# Altium PCB car_in.PcbDoc
Units mil, origin at the board's own origin, x right, y up, seen from the top; angles counter-clockwise.
Board outline 1710 x 1320 mil, 2 copper layers (Top Layer, Bottom Layer); 38 components, 25 nets, 152 pads, 64 vias.
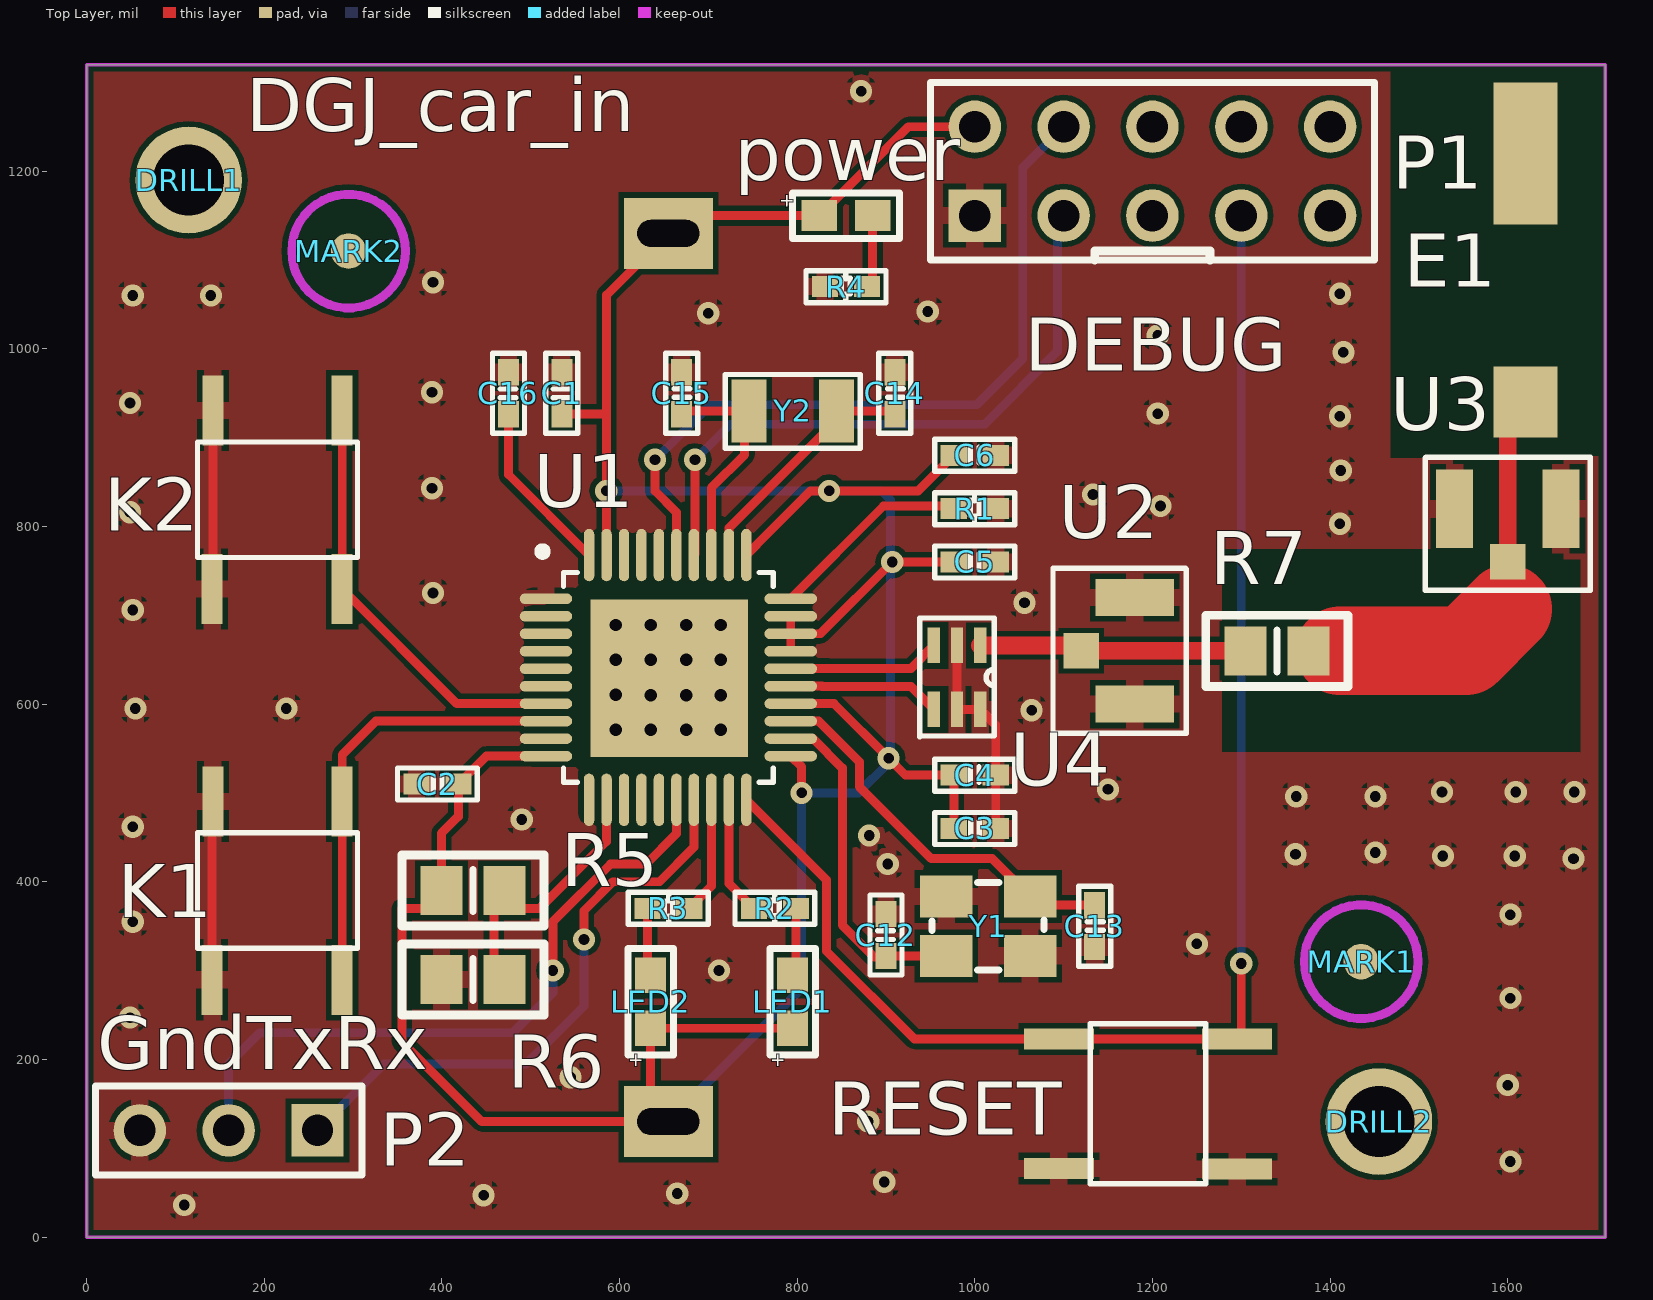
[diagram p0: Top Layer view]
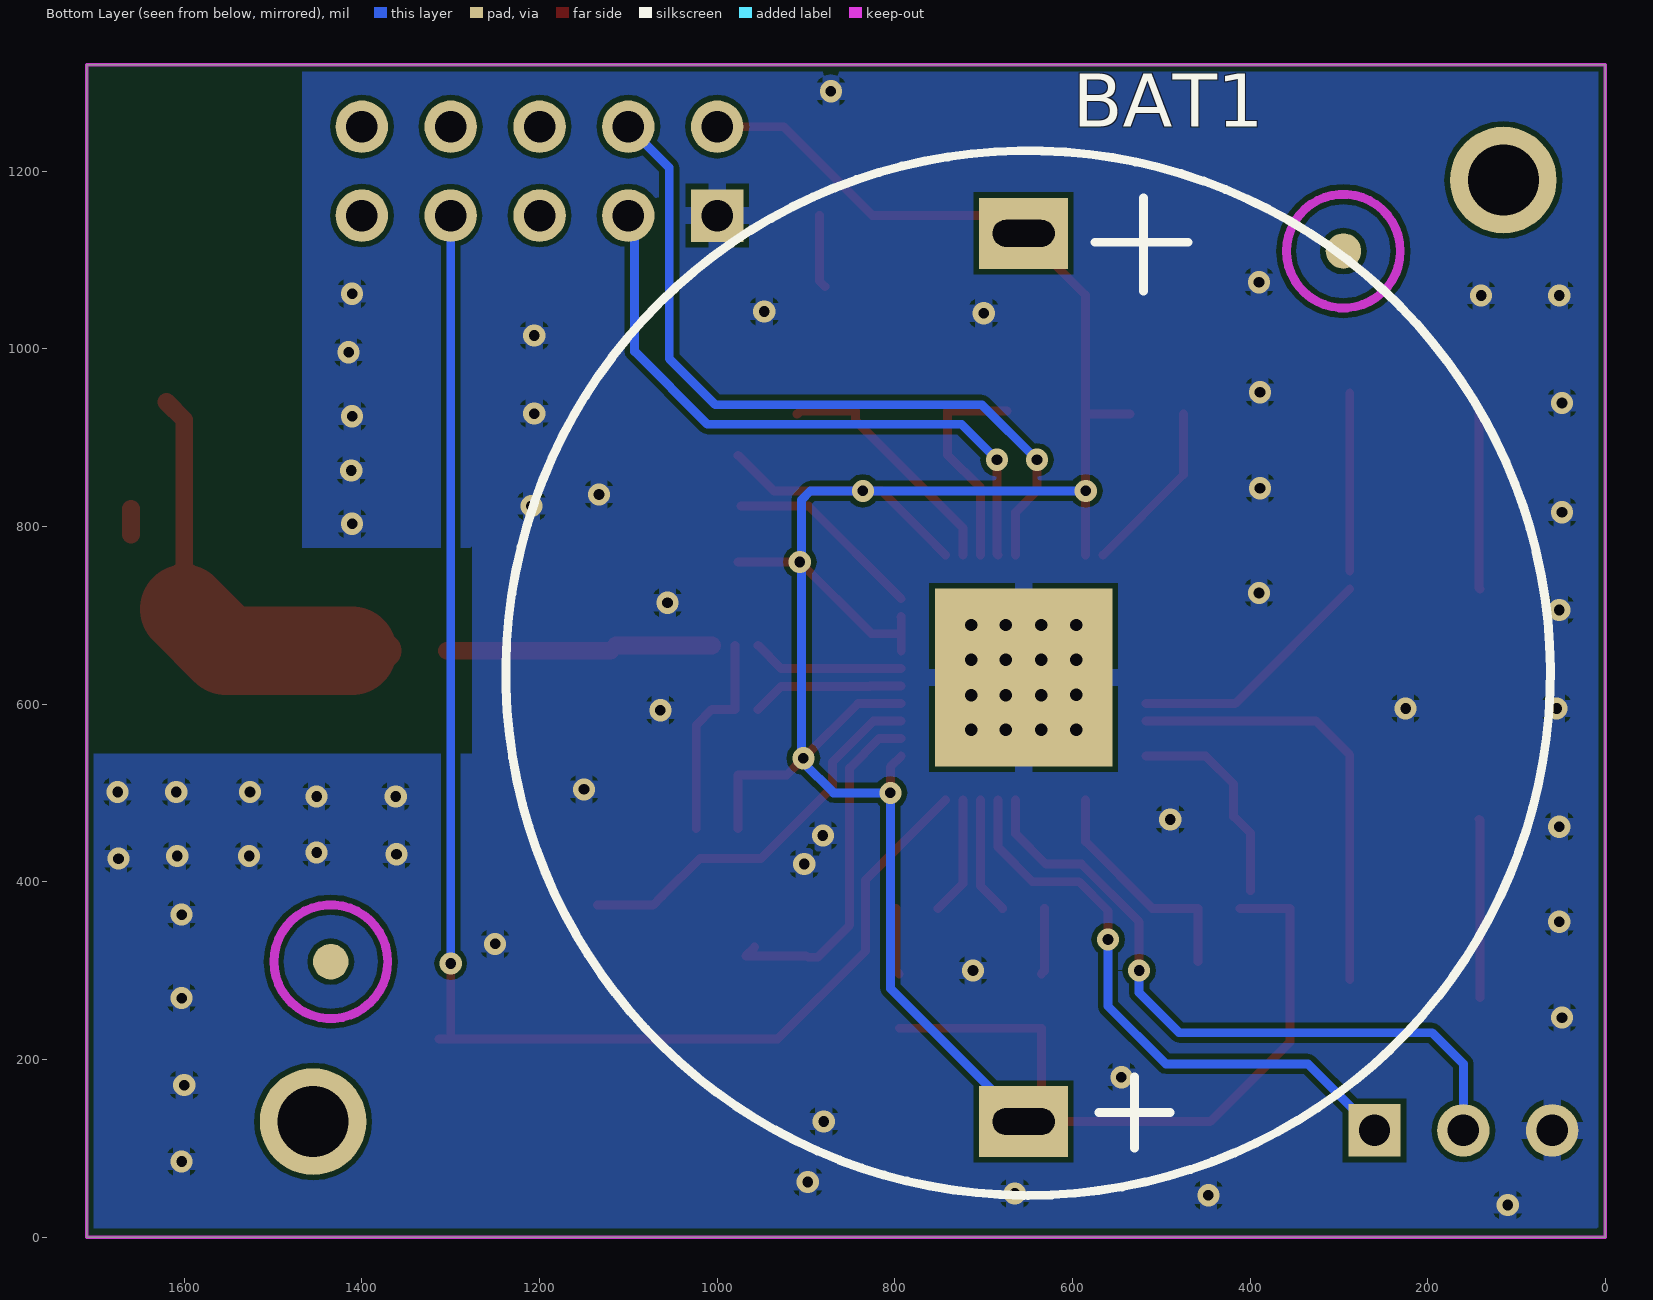
[diagram p1: Bottom Layer view, seen from below]

## Layer stack, top to bottom
Top Layer: signal copper 1.4
Dielectric: dielectric 12.6, FR-4, Dk 4.8
Bottom Layer: signal copper 1.4

## Board outline
1710,440 1710,1320 0,1320 0,0 1710,0

## Design rules (kind name [scope] priority, off if disabled: settings)
Clearance [All] p1: gap=6
DiffPairsRouting [All] p1: maxlimit=10 minlimit=10 mostfreqgap=10 maxuncoupledlength=100
PlaneConnect [All] p1: planeconnectstyle=Relief reliefexpansion=20 reliefentries=4 reliefconductorwidth=10 reliefairgap=20
PolygonConnect [All] p1: connectstyle=Relief reliefconductorwidth=20 reliefentries=4 polygonreliefangle="90 Angle"
RoutingVias [All] p1: holewidth=12 width=25 viastyle="Through Hole" minholewidth=12 minwidth=25 maxholewidth=28 maxwidth=50
SilkscreenOverComponentPads [All] p1: minsilkscreentomaskgap=10
SolderMaskExpansion [All] p1: expansion=4
Width [All] p1: maxlimit=100 minlimit=10 preferedwidth=10
25 further rules are at their usual default settings.

## Classes and differential pairs
differential pair RF1: +RF1_P -RF1_N

## Components (designator, comment, footprint, x,y, rotation, side; value= is the part's Value field where it differs from the comment)
BAT1 "BAT_CR2477" CR2477 655,630 r270 bottom
C1 "0.1uF,0402" C0402 535,950 r270 top
C2 "0.1uF,0402" C0402 395,510 r0 top
C3 "0.1uF,0402" C0402 1000,460 r0 top
C4 "0.1uF,0402" C0402 1000,520 r180 top
C5 "0.1uF,0402" C0402 1000,760 r180 top
C6 "1uF,0402" C0402 1000,880 r180 top
C12 "27pF,0402" C0402 900,340 r270 top
C13 "27pF,0402" C0402 1135,350 r90 top
C14 "15pF,0402" C0402 910,950 r90 top
C15 "15pF,0402" C0402 670,950 r90 top
C16 "0.1uF,0402" C0402 475,950 r270 top
DRILL1 "DRILL" DRILL_2MM 115,1190 r90 top
DRILL2 "DRILL" DRILL_2MM 1455,130 r90 top
E1 "2450AT42A100" BT_ANT_PCB 1620,940 r90 top
K1 "KEY_SMT_4PIN" KEY-SMT 215,390 r270 top
K2 "KEY_SMT_4PIN" KEY-SMT 215,830 r270 top
LED1 "0603_SMD" LED0603 795,265 r90 top
LED2 "0603_SMD" LED0603 635,265 r90 top
MARK1 "MARK POINT" MARK_POINT 1435,310 r90 top
MARK2 "MARK POINT" MARK_POINT 295,1110 r90 top
P1 "DEBUG" HDR2X5 1200,1200 r90 top
P2 "GndTxRx" HDR1X3 260,120 r180 top
power "0603_SMD" LED0603 855,1150 r0 top
R1 "56k,0402" R0402 1000,820 r180 top
R2 "1k,0402" R0402 775,370 r180 top
R3 "1k,0402" R0402 655,370 r0 top
R4 "1k,0402" R0402 855,1070 r180 top
R5 "15k,0805" R0805 435,390 r0 top
R6 "10k,0805" R0805 435,290 r180 top
R7 "56k,0402" R0805 1340,660 r0 top
RESET "KEY_SMT_4PIN" KEY-SMT 1195,150 r0 top
U1 "CC2541F256" PQFP40 655,630 r0 top
U2 "ipex" IPEX 1180,720 r0 top
U3 "ipex" IPEX 1540,820 r90 top
U4 "2450BM15A002" 2450BM15A002 980,630 r270 top
Y1 "32.000MHz/SX-32" 1210 1015,350 r0 top
Y2 "32.768kHz" 1206 795,930 r0 top

## Footprints (in the part's own frame and the unit in brackets; to place one, negate y for a bottom-side part, rotate by r counter-clockwise, add the part's x,y. Pads: shape width x height; smd on the part's side, far side on the other; paste and mask are expansions set on the pad)
1206 [mm]
  rect 1x1.8 smd: 1(-1.25,0) 2(1.25,0)
  silkscreen extent -1.93,-1.07 1.93,1.04
1210 [mm]
  rect 1.5x1.2 smd: 1(-1.2,-0.85) 2(1.2,-0.85) 3(1.2,0.85) 4(-1.2,0.85)
  silkscreen extent -1.6,-1.25 1.6,1.25
2450BM15A002 [mil]
  rect 40x14 smd: 1(-36,26) 2(-36,0) 3(-36,-26) 4(36,-26) 5(36,0) 6(36,26)
  silkscreen extent -67,-42 67,42
BT_ANT_PCB [mil]
  rect 80x72 smd: 1(0,0)
  rect 160x72 smd: 2(280,0)
C0402 [mm]
  rect 0.75x0.6 smd: 1(-0.6,0) 2(0.6,0)
  silkscreen extent -1.14,-0.46 1.14,0.46
CR2477 [mil]
  rect 80x100 hole 30 slot 70 at 90 deg: 1(-500,0) 1(500,0)
  rect 200x200 smd: 2(0,0)
  silkscreen extent -593,-583 583,593
DRILL_2MM [mil]
  round 120 hole 80: 1(0,0)
HDR1X3 [mm] "Connector; Header; 3 Position"
  rect 1.5x1.5 hole 0.9: 1(0,0)
  round 1.5 hole 0.9: 2(2.54,0) 3(5.08,0)
  silkscreen extent -1.27,-1.27 6.35,1.27
HDR2X5 [mm]
  rect 1.5x1.5 hole 0.9: 1(-1.27,5.08)
  round 1.5 hole 0.9: 2(1.27,5.08) 3(-1.27,2.54) 4(1.27,2.54) 5(-1.27,0) 6(1.27,0) 7(-1.27,-2.54) 8(1.27,-2.54) 9(-1.27,-5.08) 10(1.27,-5.08)
  silkscreen extent -2.54,-6.35 2.54,6.35
IPEX [mil]
  rect 40x40 smd: 1(-60,-60)
  rect 88x42 smd: 2(0,-120) 3(0,0)
  silkscreen extent -92,-153 58,33
KEY-SMT [mm]
  rect 2x0.6 smd: 1(-2.55,-1.85) 1(2.55,-1.87) 2(-2.55,1.85) 2(2.55,1.85)
  silkscreen extent -1.65,-2.29 1.65,2.29
LED0603 [mil]
  rect 40x35 smd: 1(-29.92,0) 2(29.92,0)
  silkscreen extent -60,-26 60,26
MARK_POINT [mil]
  round 40 all layers, no hole paste+40 mask+40: 1(0,0)
  Keep-Out Layer circle w10: c0,0 r64.03
PQFP40 [mm]
  oval 1.5x0.3 smd paste+0 mask+0.051: 1(-3.5,2.25) 2(-3.5,1.75) 3(-3.5,1.25) 4(-3.5,0.75) 5(-3.5,0.25) 6(-3.5,-0.25) 7(-3.5,-0.75) 8(-3.5,-1.25) 9(-3.5,-1.75) 10(-3.5,-2.25) 21(3.5,-2.25) 22(3.5,-1.75) 23(3.5,-1.25) 24(3.5,-0.75) 25(3.5,-0.25) 26(3.5,0.25) 27(3.5,0.75) 28(3.5,1.25) 29(3.5,1.75) 30(3.5,2.25)
  oval 0.3x1.5 smd paste+0 mask+0.051: 11(-2.268,-3.5) 12(-1.768,-3.5) 13(-1.268,-3.5) 14(-0.768,-3.5) 15(-0.268,-3.5) 16(0.232,-3.5) 17(0.732,-3.5) 18(1.232,-3.5) 19(1.732,-3.5) 20(2.232,-3.5) 31(2.232,3.5) 32(1.732,3.5) 33(1.232,3.5) 34(0.732,3.5) 35(0.232,3.5) 36(-0.268,3.5) 37(-0.768,3.5) 38(-1.268,3.5) 39(-1.768,3.5) 40(-2.268,3.5)
  rect 0.762x0.762 hole 0.356 paste+0 mask+0: 41(-1.5,-1.5) 41(-1.5,-0.5) 41(-1.5,0.5) 41(-1.5,1.5) 41(-0.5,-1.5) 41(-0.5,-0.508) 41(-0.5,0.5) 41(-0.5,1.5) 41(0.516,-1.5) 41(0.516,-0.508) 41(0.516,0.5) 41(0.516,1.5) 41(1.5,-1.5) 41(1.5,-0.508) 41(1.5,0.5) 41(1.5,1.5)
  rect 4.5x4.5 smd paste+0 mask+0: 41(0.024,-0.024)
  rect 4.496x4.496 smd far side: 41(0.025,0)
  silkscreen extent -3.71,-3 3,3.71
R0402 [mm]
  rect 0.75x0.6 smd: 1(-0.6,0) 2(0.6,0)
  silkscreen extent -1.14,-0.46 1.14,0.46
R0805 [mm] "Chip Resistor, Body 2.0x1.2mm, IPC Medium Density"
  rect 1.2x1.4 smd: 1(-0.9,0) 2(0.9,0)
  silkscreen extent -2.03,-1.02 2.03,1.02

## Part data
BAT1: library part BAT, "battery"
C1 C2 C3 C4 C5 C6 C12 C13 C14 C15 C16: library part CAP, "Capacitor"
E1: library part BT_ANT_PCB
K1 K2 RESET: library part KEY
LED1 LED2 power: library part LED, "led"
MARK1 MARK2: library part MARK_POINT
P1: library part "Header 5X2", "Header, 5-Pin, Dual row"
P2: library part "Header 3", "Header, 3-Pin"
R1 R2 R3 R4 R5 R6 R7: library part Res1, "Resistor"
U1: library part CC254x, "TI cc2541F256"
U2 U3: library part IPEX
Y1: library part CRYSTAL_5, "SPXO"
Y2: library part DA740C, "crystal"

## Via types
v1: diameter 25, hole 12, Top Layer to Bottom Layer, 64 vias

## Nets (pads, with @x,y where several pads share a name; then routed paths per layer and width w, separated by ;. In a path a pad name is that pad's centre, name@x,y a point inside that pad or via, vN(x,y) a via of type N, cw(c..) or ccw(c..) an arc to the next point about the centre after c; other vN are vias at no path point)
DC: P1.3 U1.34 | length 722.1
  Top Layer w10: U1.34 685,768.98 v1(685,875)
  Bottom Layer w10: v1(685,875) 725,915 1011,915 1093,997 1093,1143 P1.3
DD: P1.4 U1.35 | length 858.5
  Top Layer w10: v1(640,875) 640,840 664.13,815.87 U1.35
  Bottom Layer w10: v1(640,875) 702,937 1002,937 1054,989 1054,1204 P1.4
GND: BAT1.2 C1.1 C2.1 C3.2 C4.1 C5.1 C6.1 C12.1 C13.1 C14.2 C15.2 C16.1 K1.1 K2.1 P1.1 P2.3 R1.1 R4.2 R6.2 RESET.1 U1.1 U1.41 U2.2 U2.3 U3.2 U3.3 U4.2 U4.5 U4.6 Y1.2 Y1.4 | length 670.5
  Top Layer w10: K1.1@141.38,269.61 141.38,469.61 K1.1@142.17,470.39 ; K2.1@141.38,729.61 142.17,730.39 K2.1@142.17,930.39 ; U4.2 U4.5 U4.6 1023.62,576.38 C4.1 C3.2
  Top Layer w20: U3.2@1660,791 U3.2
  other v1: 110,36 447,47 665,49 898,62 1603,85 880,130 1600,171 545,180 49,247 1603,269 712,300 1250,330 52,355 1603,363 902,420 1674,426 1527,429 1608,429 1361,431 1451,433 881,452 52,462 490,470 1362,496 1451,496 1526,501 1609,501 1675,501 1150,504 1064,593 55,595 225,595 52,706 1056,714 390,725 1411,803 49,816 1209,823 1133,836 389,843 1412,863 1411,924 1206,927 49,939 389,951 1415,996 1206,1015 700,1040 947,1042 52,1060 140,1060 1411,1062 390,1075 872,1290
KEY1: K1.2 U1.8 | length 498.3
  Top Layer w10: K1.2@287.83,289.61 287.83,490.39 287.83,542.83 325.79,580.79 U1.8
KEY2: K2.2 U1.7 | length 483.6
  Top Layer w10: K2.2@287.83,729.61 416.97,600.47 U1.7 ; K2.2@287.83,749.61 K2.2@287.83,950.39
LED1: R2.2 U1.19 | length 133.9
  Top Layer w10: U1.19 723.19,398.19 R2.2
LED2: R3.2 U1.18 | length 132.5
  Top Layer w10: R3.2 703.5,394.88 U1.18
NetC12_2: C12.2 U1.22 Y1.1 | length 392.3
  Top Layer w10: U1.22 817.9,561.1 851,528 851,351 887,315 C12.2@898,315 ; C12.2 Y1.1@967.6,316.38 ; Y1.1@957.91,326.38 Y1.1
NetC13_2: C13.2 U1.23 Y1.3 | length 444.4
  Top Layer w10: U1.23 824.21,580.79 870,535 870,507 951,426 1019.71,426 Y1.3 1072.09,373.62 C13.2
NetC14_1: C14.1 U1.32 Y2.2 | length 279.6
  Top Layer w10: U1.32 723.19,798.19 844.21,919.21 Y2.2 906.38,930 C14.1
NetC15_1: C15.1 U1.33 Y2.1 | length 244.8
  Top Layer w10: C15.1@673.62,930 740.79,930 740.79,880.79 703.5,843.5 U1.33
NetC16_2: C16.2 U1.40 | length 196.2
  Top Layer w10: C16.2 475,858.5 U1.40
NetE1_1: E1.1 R7.2 U3.1 | length 485.3
  Top Layer w20: U3.1@1600,740 1600,920 E1.1
  Top Layer w40: R7.2 1411,660 ; 1600,707 U3.1@1600,740
  Top Layer w100: 1411,660 1553,660 1600,707
NetLED1_2: LED1.2 R2.1 | length 75.2
  Top Layer w10: LED1.2@795,296.26 798.62,299.88 R2.1
NetLED2_2: LED2.2 R3.1 | length 75.2
  Top Layer w10: R3.1 631.38,299.88 LED2.2@635,296.26
Netpower_2: power.2 R4.1 | length 82.6
  Top Layer w10: R4.1 884.92,1076.3 power.2
NetR1_2: R1.2 U1.30 | length 223.5
  Top Layer w10: U1.30 897.21,823 R1.2@973,823
NetR7_1: R7.1 U2.1 U4.1 | length 301.1
  Top Layer w10: U2.1@1114,666 U2.1
  Top Layer w20: U4.1 U2.1@1114,666 ; U2.1 R7.1
RESET: P1.7 RESET.2 U1.20 | length 1651.2
  Top Layer w10: U1.20 833,402.07 833,322 932.17,222.83 1094.61,222.83 1295.39,222.83 RESET.2@1313,222.83 ; RESET.2@1300,227.44 v1(1300,308)
  Bottom Layer w10: v1(1300,308) P1.7
RF1_N: U1.26 U4.3 | length 172
  Top Layer w10: U1.26@792.8,640.16 836.28,640.16 836.44,640 928,640 U4.3
RF1_P: U1.25 U4.4 | length 172
  Top Layer w10: U1.25 828,620.16 828.16,620 928,620 U4.4
RX: P2.1 U1.17 | length 682.8
  Top Layer w10: v1(560,335) 560,367.37 592.63,400 645,400 683.82,438.82 U1.17
  Bottom Layer w10: P2.1@252.5,112.5 335,195 495,195 560,260 v1(560,335)
TX: P2.2 U1.16 | length 771.4
  Top Layer w10: v1(525,300) 525,355 590,420 630,420 664.13,454.13 U1.16
  Bottom Layer w10: P2.2 160,195 195,230 480,230 525,275 v1(525,300)
VCC33V: BAT1.1 C1.2 C2.2 C3.1 C4.2 C5.2 C6.2 LED1.1 LED2.1 P1.2 power.1 R5.1 U1.10 U1.21 U1.24 U1.27 U1.28 U1.29 U1.31 U1.39 | length 3946.2
  Top Layer w10: R5.1 399.57,454.57 418.62,473.62 C2.2 450.04,541.42 U1.10 ; R5.1@411.38,370 355,370 355,220 445,130 655,130 635,150 LED2.1 LED1.1 ; C1.2 581.77,926.38 585.39,930 ; U1.39 585.39,930 ; U1.31 755.07,780 ; U1.31@742.83,767.83 815,840 936.38,840 C6.2 ; U1.21 805,529.21 v1(805,500) ; U1.24 841.53,600.47 v1(903,539) ; U1.27 U1.28 ; U1.29@793.43,698.27 U1.29 U1.28 ; U1.28@793.58,680 U1.28 ; v1@905,537 v1(903,539) ; C3.1 C4.2 922,520 v1(903,539) ; C5.2 v1(907,760) 826.21,679.21 U1.28 ; P1.2 925.08,1250 power.1 675,1150 655,1130 585.39,1060.39 585.39,930
  Bottom Layer w10: v1(585,840) 895,840 905,830 905,539 905,536 v1@903,534 ; BAT1.1@655,130 805,280 v1(805,500) 869,500 v1@903,534 ; v1(903,539) v1@903,534
  other v1: 836,840
VMONITOR: R5.2 R6.1 U1.12 | length 264.8
  Top Layer w10: R6.1@458.62,310 458.62,370 510,370 585.39,445.39 U1.12
pads on no net: DRILL1.1 DRILL2.1 E1.2 MARK1.1 MARK2.1 P1.5 P1.6 P1.8 P1.9 P1.10 U1.2 U1.3 U1.4 U1.5 U1.6 U1.9 U1.11 U1.13 U1.14 U1.15 U1.36 U1.37 U1.38

## Polygon pours and split planes (outlines as drawn)
GND on Mechanical 1 "Top Layer-No Net" (solid, remove dead copper): 0,0 5,5 1705,5 1705,1320 0,1320
GND on Bottom Layer "Top Layer-No Net" (solid, pour order 1000): 0,1302 0,0 10,10 1710,10 1710,546 1708,544 1276,544 1276,778 1278,776 1467,776 1467,1318 1469,1320 0,1320
GND on Top Layer "Top Layer-No Net" (solid, remove dead copper, pour order 1001): 0,1320 0,0 1710,0 1710,878 1709,879 1663,879 1663,763 1682,763 1682,545 1683,544 1681,546 1278,546 1278,773 1280,775 1538,775 1538,877 1539,878 1538,877 1468,877 1468,1319 1467,1320

## Keep-outs
Keep-Out Layer:
  lines w4: 0,0 0,1320 1710,1320 1710,0 0,0

## Silkscreen, mask and mechanical layers (free items; w line width, h text height)
Top Overlay:
  text "DGJ_car_in" at 180,1245 h60
Mechanical 1:
  lines w10: 0,0 0,1320 1710,1320 1710,0 0,0

## Text inside footprints (layer, text, board x,y; h text height)
LED1: Top Overlay "+" at 785,190 h15 r90
LED2: Top Overlay "+" at 625,190 h15 r90
power: Top Overlay "+" at 780,1160 h15